# EAGLE board LCmeter0-LCD-8pinlcd-PIC18F2550-COMP (EAGLE 7.6.0)
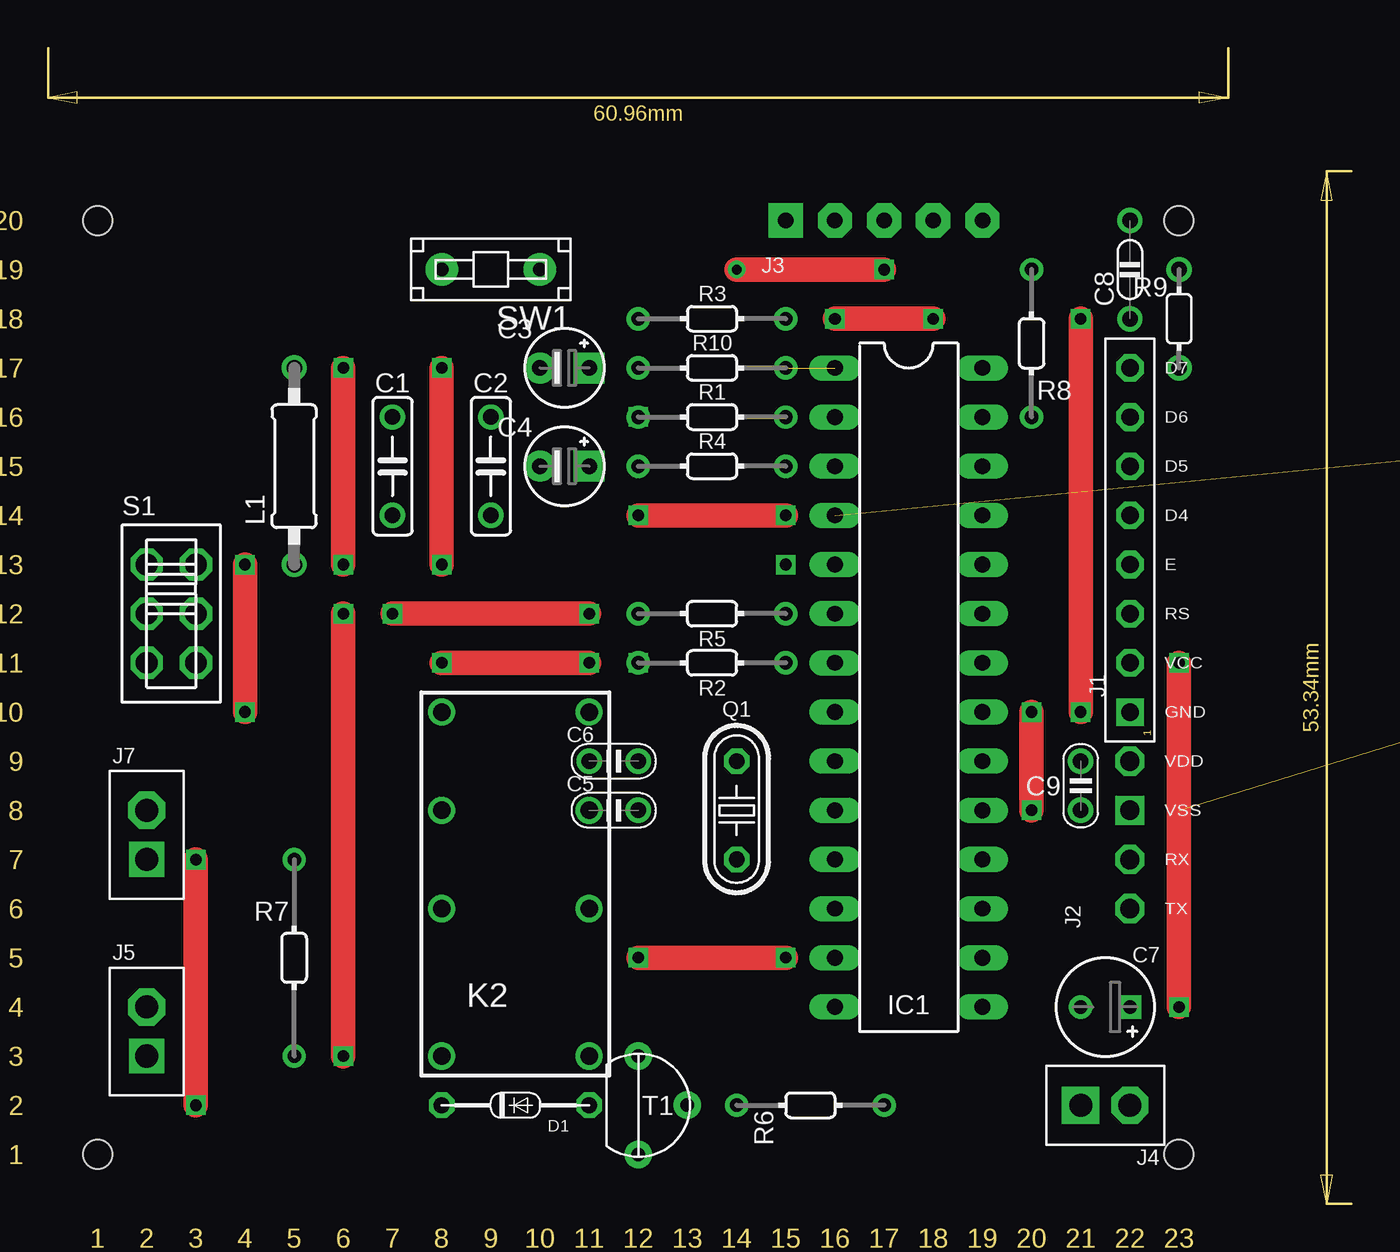
[diagram p0: board, top side]
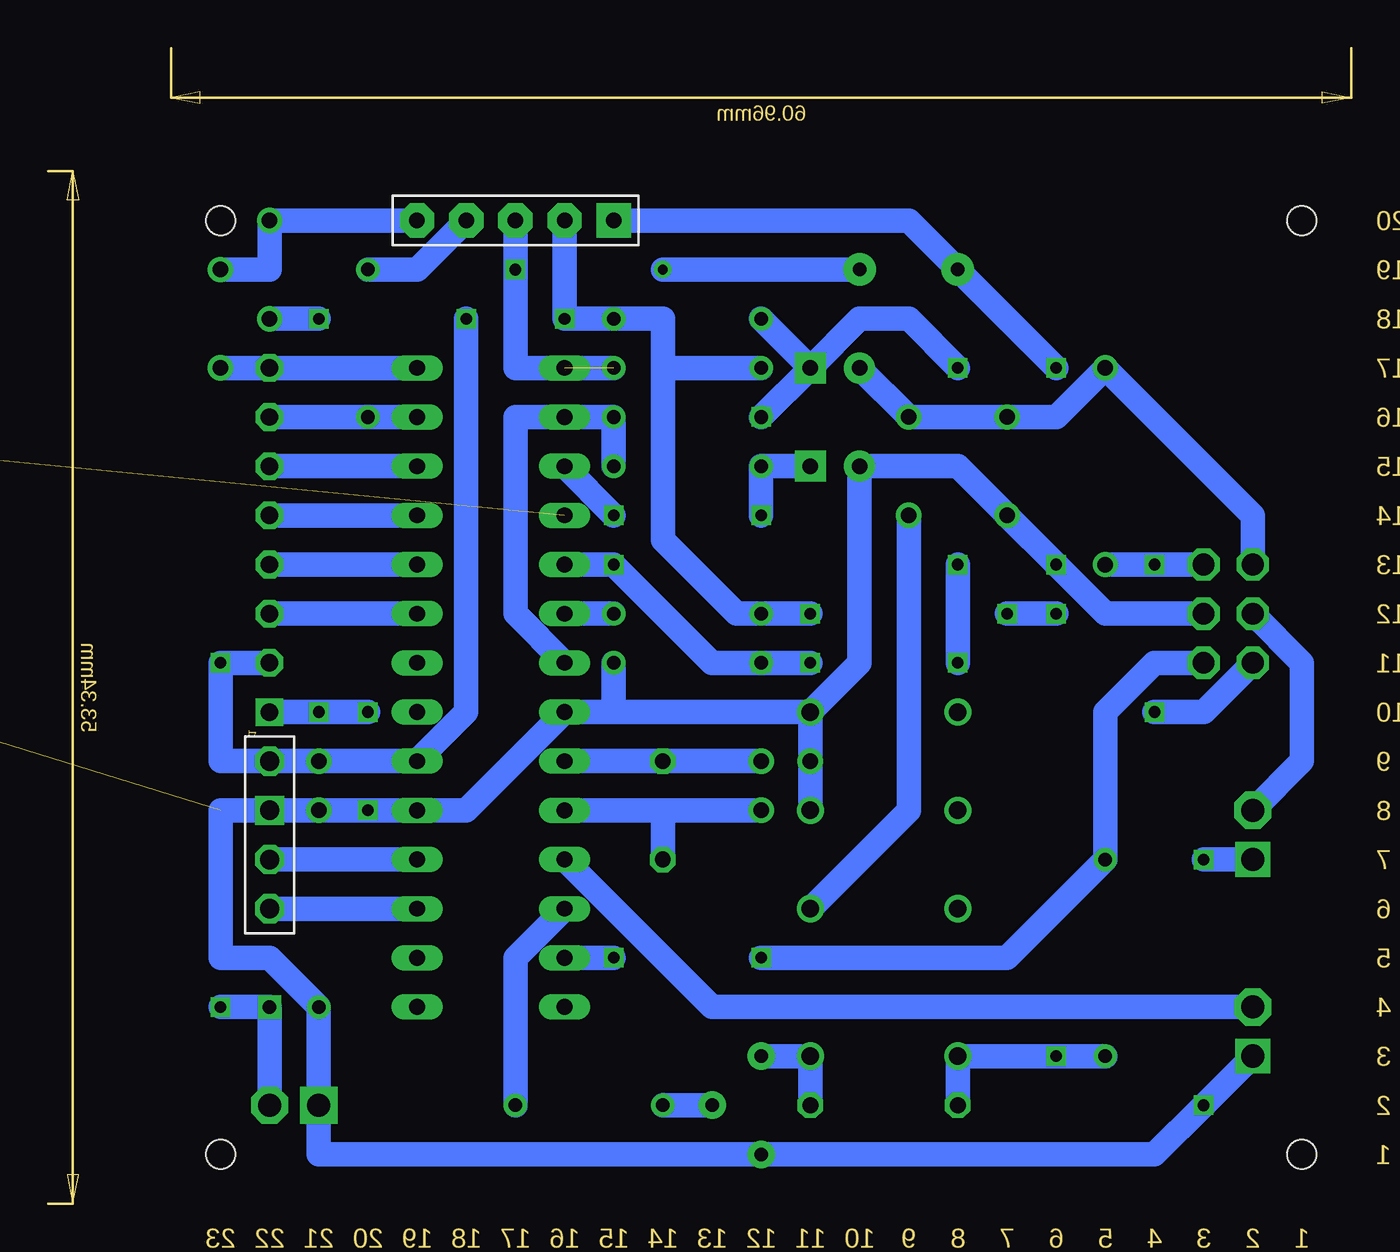
[diagram p1: board, bottom side, seen from below]

Size 67.31 x 59.69 mm. Coordinates in mm from the lower left corner, seen from the top.
Copper layers (1*16): Top 0.035mm / dielectric 1.5mm / Bottom 0.035mm
Design rules "default *": minimum track width 10mil, minimum drill 24mil, track to track 0mil, track to pad 0mil, pad to pad 0mil, via to via 0mil, smd to smd 8mil, copper to edge 40mil, drill to drill 8mil, minimum pad ring 10mil, minimum via ring 8mil, stop-mask expansion 4mil, vias tented up to drill 0mil, thermal gap 10mil
Net classes: 0 default: width 0.61 mm
Holes 1.5 mm at 2.54,50.8 58.42,50.8 58.42,2.54 2.54,2.54

## Footprints (pad centres in the part's own frame; a part is rotated, then mirrored left to right if it is on the bottom)
C050-025X060 = drill 0.8: 1 0,2.54; 2 0,-2.54
E2,5-4 = drill 0.8 pad 1.6 square: + 1.27,0 | drill 0.8 pad 1.6: - -1.27,0
C025-020X036 = drill 0.8: 1 0,0; 2 2.54,0
E2,5-5 = drill 0.7 square: + 1.27,0 | drill 0.7: - -1.27,0
C050-020X036 = drill 0.8: 1 0,-2.54; 2 0,2.54
C025-020X036/V = drill 0.8: 1 0,-1.27; 2 0,1.27
DO34-7 = drill 0.813 octagon: A 3.81,0; C -3.81,0
DIL28-3/V = drill 0.813 long: 1 -3.81,16.51; 2 -3.81,13.97; 3 -3.81,11.43; 4 -3.81,8.89; 5 -3.81,6.35; 6 -3.81,3.81; 7 -3.81,1.27; 8 -3.81,-1.27; 9 -3.81,-3.81; 10 -3.81,-6.35; 11 -3.81,-8.89; 12 -3.81,-11.43; 13 -3.81,-13.97; 14 -3.81,-16.51; 15 3.81,-16.51; 16 3.81,-13.97; 17 3.81,-11.43; 18 3.81,-8.89; 19 3.81,-6.35; 20 3.81,-3.81; 21 3.81,-1.27; 22 3.81,1.27; 23 3.81,3.81; 24 3.81,6.35; 25 3.81,8.89; 26 3.81,11.43; 27 3.81,13.97; 28 3.81,16.51
CONN-LCD44780 = drill 0.9 pad 1.422 octagon: D4 0,10.16; D5 0,12.7; D6 0,15.24; D7 0,17.78; E 0,7.62; RS 0,5.08; VCC 0,2.54 | drill 0.9 pad 1.422 square: GND 0,0
PIC-UART = drill 1 octagon: 17 0,0; 18 0,2.54; 20 0,7.62 | drill 1 square: 19 0,5.08
PIC-ICSP = drill 0.8 pad 1.778 square: 1 0,0 | drill 0.8 pad 1.778 octagon: 2 2.54,0; 3 5.08,0; 4 7.62,0; 5 10.16,0
CONN-2P = drill 1.2 pad 1.93 square: 1 0,0 | drill 1.2 pad 1.93 octagon: 2 -2.54,0
CONN-2P-V = drill 1.2 pad 1.778 square: 1 0,0 | drill 1.2 pad 1.93 octagon: 2 0,2.54
DS2Y = drill 0.9: 1 -8.89,-3.81; 4 -1.27,-3.81; 6 3.81,-3.81; 8 8.89,-3.81; 9 8.89,3.81; 11 3.81,3.81; 13 -1.27,3.81; 16 -8.89,3.81
0207/10 = drill 0.8: 1 -5.08,0; 2 5.08,0
LED3MM = drill 0.813 octagon: A -1.27,0; K 1.27,0
HC49 = drill 0.813 octagon: 1 0,-2.54; 2 0,2.54
0202/7 = drill 0.7: 1 -3.81,0; 2 3.81,0
0202/7-V = drill 0.7: 1 0,-3.81; 2 0,3.81
0202/10-V = drill 0.7: 1 0,-5.08; 2 0,5.08
0202/5-V = drill 0.8: 1 0,2.54; 2 0,-2.54
SLSW-2P2T = drill 1.118 pad 1.524 octagon: 1 -1.27,2.54; 2 -1.27,0; 3 -1.27,-2.54; 4 1.27,2.54; 5 1.27,0; 6 1.27,-2.54
PB-1P1T = drill 0.7 pad 1.676: 1 2.54,0; 2 -2.54,0
TO92-CBE-A = drill 0.7 pad 1.422: B 2.54,0; C 0,2.54; E 0,-2.54

## Placement (x,y rotation side)
C1  1nF  [C050-025X060]  17.78,38.1 0 top
C2  1nF  [C050-025X060]  22.86,38.1 0 top
C3  10μF  [E2,5-4]  26.67,43.18 0 top
C4  10μF  [E2,5-4]  26.67,38.1 0 top
C5  33pF  [C025-020X036]  27.94,20.32 0 top
C6  33pF  [C025-020X036]  27.94,22.86 0 top
C7  100μF  [E2,5-5]  54.61,10.16 0 top
C8  22pF  [C050-020X036]  55.88,48.26 0 top
C9  100nF  [C025-020X036/V]  53.34,21.59 0 top
D1  1N4148  [DO34-7]  24.13,5.08 0 top
IC1  PIC18F2550-I/SP-COMP-B-V  [DIL28-3/V]  44.45,26.67 0 top
J1  HD44780-4BITLCD44780-8P  [CONN-LCD44780]  55.88,25.4 0 top
J2  PIC-UART  [PIC-UART]  55.88,15.24 0 top
J3  PIC-ICSP  [PIC-ICSP]  38.1,50.8 0 top
J4  J4  [CONN-2P]  53.34,5.08 180 top
J5  CONN-2P2P/V  [CONN-2P-V]  5.08,7.62 0 top
J7  CONN-2P2P/V  [CONN-2P-V]  5.08,17.78 0 top
K2  DS2Y  [DS2Y]  24.13,16.51 90 top
L1  82μH  [0207/10]  12.7,38.1 90 top
LED1  TLLG4400  [LED3MM]  74.93,26.67 270 top  (outside the outline)
Q1  20MHz  [HC49]  35.56,20.32 0 top
R1  100k  [0202/7]  34.29,40.64 0 top
R2  100k  [0202/7]  34.29,27.94 180 top
R3  100k  [0202/7]  34.29,45.72 0 top
R4  47k  [0202/7]  34.29,38.1 0 top
R5  4.7k  [0202/7]  34.29,30.48 180 top
R6  10k  [0202/7-V]  39.37,5.08 90 top
R7  10k  [0202/10-V]  12.7,12.7 0 top
R8  100  [0202/7-V]  50.8,44.45 180 top
R9  100  [0202/5-V]  58.42,45.72 0 top
R10  4.7k  [0202/7]  34.29,43.18 0 top
R11  1k  [0202/5-V]  80.01,36.83 180 top  (outside the outline)
S1  SL-SW-2P-2T  [SLSW-2P2T]  6.35,30.48 0 top
SW1  PB-1P-1T  [PB-1P1T]  22.86,48.26 180 top
T1  BC547  [TO92-CBE-A]  30.48,5.08 0 top

## Library data of the parts
C1-C9 = c
D1 = d
IC1 = mcu
J1-J5 J7 = pinconn
K2 = relay; MPN: DS2Y-S-DC5V; OC_FARNELL: unknown; OC_NEWARK: 13P3268
L1 R1-R11 = r
LED1 = led; MF: VISHAY SEMICONDUCTOR; OC_FARNELL: 1612435
Q1 = q
S1 SW1 = sw
T1 = t

## Nets
/LC: IC1.13 R7.2 S1.6
/MCLR: IC1.1 J3.3 R10.2 SW1.2
/RELAY: IC1.12 R6.1
/RX: IC1.18 J2.18
/TX: IC1.17 J2.17
A0: IC1.2 IC1.7 R1.2 R4.2
A1: C4.+ IC1.3 R4.1
A3: C3.+ IC1.5 R1.1 R2.2 R3.1
A4: IC1.6 R5.1
C2_CON: C2.2 K2.4
D4: IC1.25 J1.D4
D5: IC1.26 J1.D5
D6: IC1.27 J1.D6 R8.2
D7: IC1.28 J1.D7 R9.2
E: IC1.24 J1.E
FREQ: IC1.11 J5.2
GND: C1.2 C4.- C5.1 C6.1 C7.- C8.1 C9.1 IC1.8 IC1.19 J1.GND J2.19 J3.1 J4.1 J5.1 J7.1 K2.8 LED1.K R2.1 S1.5 SW1.1 T1.E
IN+: J7.2 S1.2
N$1: LED1.A R11.1
N$2: C1.1 C2.1 C3.- L1.2 S1.1
N$3: IC1.4 R11.2
N$6: R6.2 T1.B
N$7: L1.1 S1.3 S1.4
N$8: D1.A K2.1 T1.C
OSC1: C6.2 IC1.9 Q1.2
OSC2: C5.2 IC1.10 Q1.1
PGC: J3.4 R8.1
PGD: C8.2 J3.5 R9.1
RS: IC1.23 J1.RS
VCC: C7.+ C9.2 D1.C IC1.20 J1.VCC J2.20 J3.2 J4.2 K2.16 R3.2 R5.2 R7.1 R10.1

## Tracks (layer width: path | path; a pad name or v marks a point on that pad's centre or on a via)
/LC  (via drill 0.6)
  Top 1.27: v30.48,12.7 v38.1,12.7
  Bottom 1.27: v30.48,12.7 17.78,12.7 R7.2 12.7,25.4 10.16,27.94 S1.6 | v38.1,12.7 IC1.13
/MCLR  (via drill 0.5, 0.6)  (1 unrouted)
  Top 1.27: v35.56,48.26 v43.18,48.26
  Bottom 1.27: J3.3 v43.18,48.26 43.18,43.18 R10.2 | v35.56,48.26 SW1.2
/RELAY
  Bottom 1.27: IC1.12 43.18,12.7 R6.1
/RX
  Bottom 1.27: IC1.18 J2.18
/TX
  Bottom 1.27: J2.17 IC1.17
A0
  Bottom 1.27: R4.2 R1.2 IC1.2 43.18,40.64 43.18,30.48 IC1.7
A1  (via drill 0.6)
  Top 1.27: v30.48,35.56 v38.1,35.56
  Bottom 1.27: v30.48,35.56 R4.1 C4.+ | IC1.3 v38.1,35.56
A3  (via drill 0.6)
  Top 1.27: v27.94,27.94 v20.32,27.94 | v20.32,33.02 v20.32,43.18
  Bottom 1.27: R3.1 C3.+ | R1.1 C3.+ | IC1.5 v38.1,33.02 33.02,27.94 R2.2 v27.94,27.94 | v20.32,27.94 v20.32,33.02 | v20.32,43.18 22.86,45.72 25.4,45.72 C3.+
  other vias: 30.48,40.64 30.48,27.94
A4
  Bottom 1.27: R5.1 IC1.6
C2_CON
  Bottom 1.27: K2.4 22.86,20.32 C2.2
D4
  Bottom 1.27: J1.D4 IC1.25
D5
  Bottom 1.27: IC1.26 J1.D5
D6
  Bottom 1.27: J1.D6 R8.2 IC1.27
D7
  Bottom 1.27: R9.2 J1.D7 IC1.28
E
  Bottom 1.27: IC1.24 J1.E
FREQ
  Bottom 1.27: J5.2 33.02,10.16 IC1.11
GND  (via drill 0.6)  (1 unrouted)
  Top 1.27: v50.8,25.4 v50.8,20.32 | v15.24,43.18 v15.24,33.02 | v53.34,45.72 v53.34,25.4 | v7.62,17.78 v7.62,5.08
  Bottom 1.27: C5.1 C6.1 K2.8 | K2.8 38.1,25.4 | v50.8,25.4 v53.34,25.4 J1.GND | v15.24,33.02 20.32,38.1 C4.- 25.4,27.94 K2.8 | C1.2 v15.24,33.02 | v15.24,43.18 SW1.1 22.86,50.8 J3.1 | v53.34,45.72 C8.1 | J7.1 v7.62,17.78 | J5.1 v7.62,5.08 10.16,2.54 T1.E 53.34,2.54 J4.1 C7.- 55.88,12.7 58.42,12.7 58.42,20.32 J2.19 C9.1 v50.8,20.32 IC1.19 45.72,20.32 IC1.8 38.1,25.4 | v15.24,33.02 12.7,30.48 S1.5 | R2.1 38.1,25.4
IN+
  Bottom 1.27: S1.2 2.54,27.94 2.54,22.86 J7.2
N$1  (1 unrouted)
N$2
  Bottom 1.27: C3.- C2.1 C1.1 15.24,40.64 L1.2 5.08,35.56 S1.1
N$3  (1 unrouted)
N$6
  Bottom 1.27: T1.B R6.2
N$7  (via drill 0.6)
  Top 1.27: v10.16,33.02 v10.16,25.4
  Bottom 1.27: v10.16,25.4 7.62,25.4 S1.3 | S1.4 v10.16,33.02 L1.1
N$8
  Bottom 1.27: T1.C K2.1 D1.A
OSC1
  Bottom 1.27: C6.2 Q1.2 IC1.9
OSC2
  Bottom 1.27: C5.2 35.56,20.32 | Q1.1 35.56,20.32 | 35.56,20.32 IC1.10
PGC
  Bottom 1.27: J3.4 48.26,48.26 R8.1
PGD
  Bottom 1.27: J3.5 C8.2 55.88,48.26 R9.1
RS
  Bottom 1.27: J1.RS IC1.23
VCC  (via drill 0.6)
  Top 1.27: v15.24,30.48 v15.24,7.62 | v17.78,30.48 v27.94,30.48 | v45.72,45.72 v40.64,45.72 | v58.42,27.94 v58.42,10.16
  Bottom 1.27: R7.1 v15.24,7.62 K2.16 D1.C | v27.94,30.48 R5.2 31.75,30.48 35.56,34.29 35.56,43.18 | 35.56,43.18 35.56,45.72 R3.2 v40.64,45.72 J3.2 | v15.24,30.48 v17.78,30.48 | v45.72,45.72 45.72,25.4 IC1.20 C9.2 J2.20 58.42,22.86 v58.42,27.94 J1.VCC | R10.1 35.56,43.18 | J4.2 C7.+ v58.42,10.16

## Text on the board
Dimension: 20 | 19 | 18 | 17 | 16 | 15 | 14 | 13 | 12 | 11 | 10 | 9 | 8 | 7 | 6 | 5 | 4 | 3 | 2 | 1 | 1 | 2 | 3 | 4 | 5 | 6 | 7 | 8 | 9 | 10 | 11 | 12 | 13 | 14 | 15 | 16 | 17 | 18 | 19 | 20 | 21 | 22 | 23